# Altium PCB PCB_SystemMove30062018.PcbDoc
Units mm, origin at the board's own origin, x right, y up, seen from the top; angles counter-clockwise.
Board outline 50 x 25 mm, 4 copper layers (Top Layer, L1(GND), VCC, Bottom Layer), stack 0.95 mm thick; 46 components, 32 nets, 228 pads, 40 vias.
Unrouted connection lines stored in the file: 32.
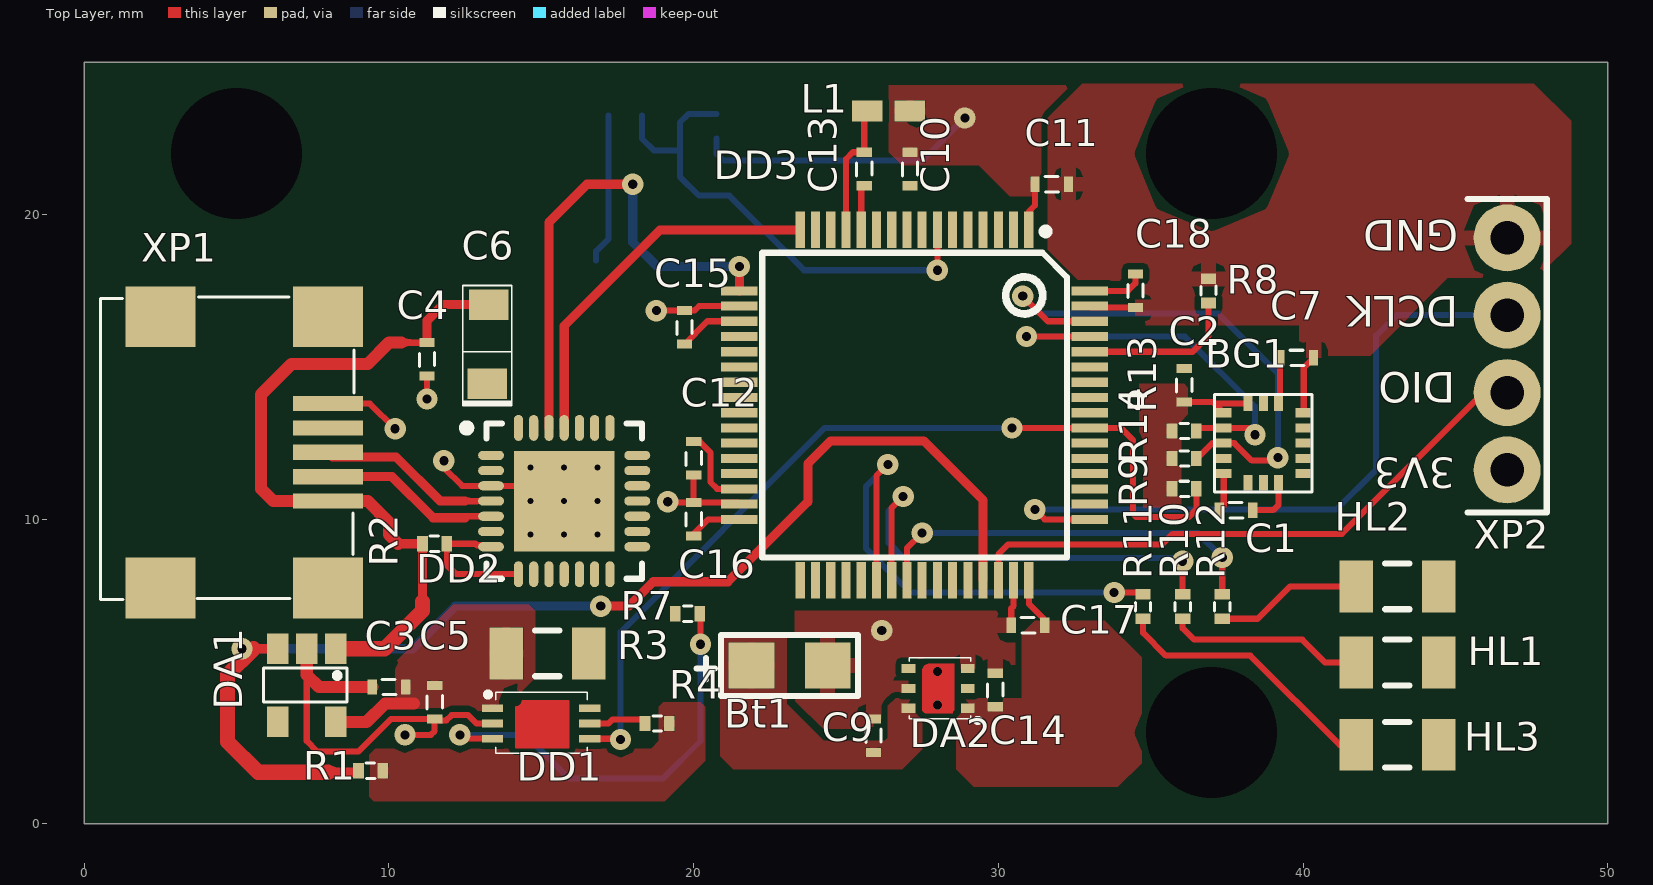
[diagram p0: Top Layer view]
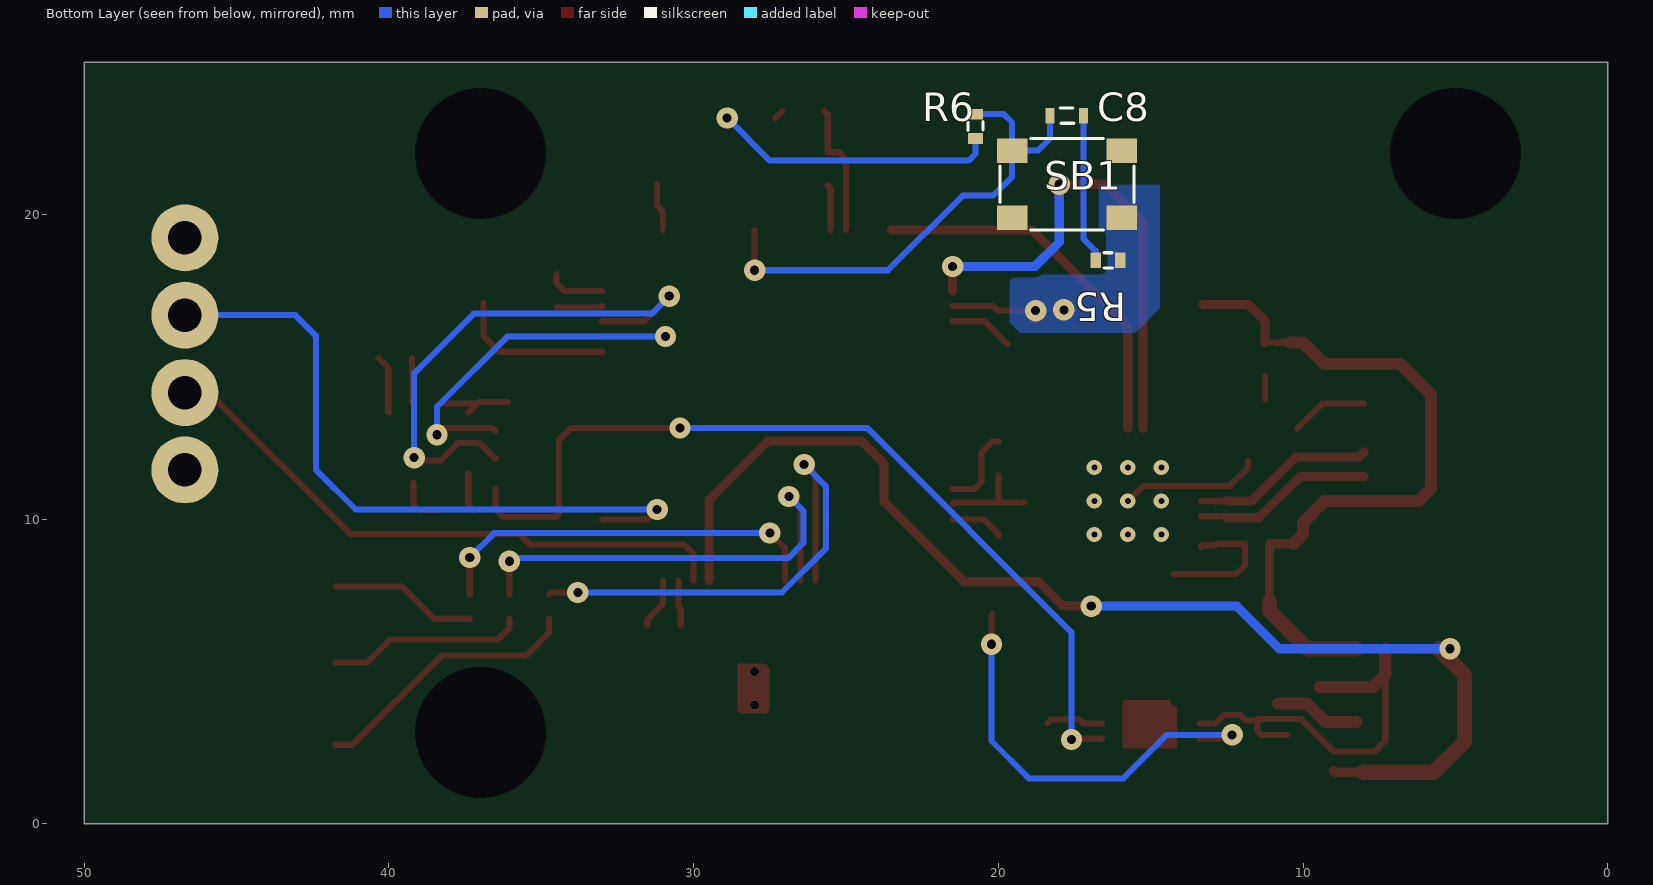
[diagram p1: Bottom Layer view, seen from below]
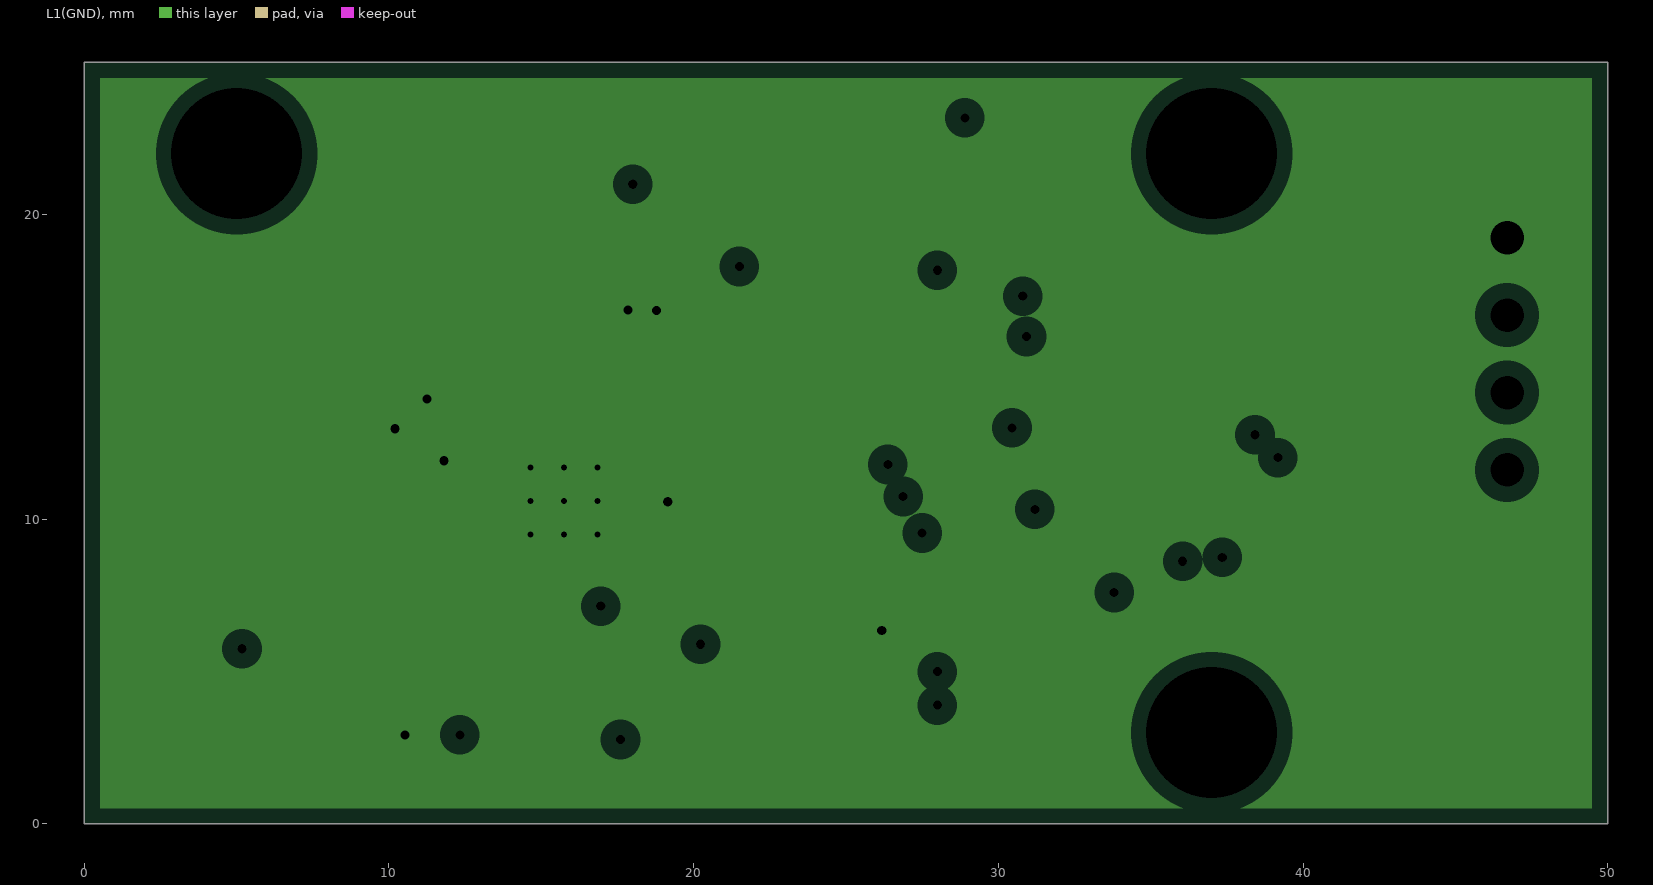
[diagram p2: L1(GND), clearances drawn from the general rule]

## Layer stack, top to bottom
Top Solder: solder mask 0.0102, Solder Resist, Dk 3.5
Top Layer: signal copper 0.035
Dielectric 1: prepreg 0.15, Dk 4.2
L1(GND): plane copper 0.035, net GND
Dielectric 3: core 0.51, FR-4, Dk 4.2
VCC: signal copper 0.035
Dielectric 2: prepreg 0.15, Dk 4.2
Bottom Layer: signal copper 0.035
Bottom Solder: solder mask 0.0102, Solder Resist, Dk 3.5

## Board outline
0,0 0,25 50,25 50,0

## Design rules (kind name [scope] priority, off if disabled: settings)
Clearance [All] p1: gap=0.2 ignorepadtopadclearanceinfootprint=FALSE
Clearance Clearance_Multilayer [OnLayer('Multi-Layer') AND IsPad] p2: gap=0.25 ignorepadtopadclearanceinfootprint=FALSE
DiffPairsRouting [InDifferentialPair('NewDifferentialPairUSB')] p1: maxlimit=0.25 minlimit=0.25 mostfreqgap=0.25 toplayer_minwidth=0.2 toplayer_maxwidth=0.5 toplayer_prefwidth=0.5 midlayer1_minwidth=0.2 midlayer1_maxwidth=0.5 midlayer1_prefwidth=0.5 bottomlayer_minwidth=0.2 bottomlayer_maxwidth=0.5 bottomlayer_prefwidth=0.5 maxuncoupledlength=12.7
PlaneClearance [All] p1: clearance=0.5
PlaneConnect PlaneConnect_Power [InPadClass('Power')] p1: planeconnectstyle=Direct reliefexpansion=0.508 reliefentries=4 reliefconductorwidth=0.254 reliefairgap=0.254
PolygonConnect [InNetClass('Digit')] p1: connectstyle=Relief reliefconductorwidth=0.3 reliefentries=4 polygonreliefangle="90 Angle" airgapwidth=0.2
PolygonConnect PolygonConnect_Via [IsVia] p2: connectstyle=Direct reliefconductorwidth=0.254 reliefentries=4 polygonreliefangle="90 Angle" airgapwidth=0.254
PolygonConnect PolygonConnect_GND [(InNet('AGND') OR InNet('GND')) AND IsPad] p3: connectstyle=Direct reliefconductorwidth=0.5 reliefentries=4 polygonreliefangle="90 Angle" airgapwidth=0.3
RoutingVias [All] p1: holewidth=0.3 width=0.7 viastyle="Through Hole" minholewidth=0.3 minwidth=0.7 maxholewidth=0.3 maxwidth=0.7
SolderMaskExpansion [All] p1: expansion=0.102
Width [All] p1: maxlimit=5 minlimit=0.15 preferedwidth=0.5
27 further rules are at their usual default settings.

## Classes and differential pairs
pad class Power: Bt1-1 Bt1-2 C3-1 C3-2 C5-1 C5-2 C8-1 C8-2 C9-1 C9-2 C14-1 C14-2 DA1-1 DA1-2 DA1-3 DA1-4 DA1-5 DA2-1 DA2-2 DA2-3 DA2-4 DA2-5 DA2-6 DD1-1 DD1-2 DD1-3 DD1-4 DD1-5 DD1-6 R1-1 R1-2 R3-1 R3-2 R4-1 R4-2 R10-1 R10-2 R11-1 R11-2 R12-1 R12-2 R13-1 R13-2 R14-1 R14-2 SB1-1 SB1-2 SB1-3 SB1-4 XP1-3
net class Power_NetClass: +3.3V +3.7V +5VUsb AGND AVDD GND NetC3_1 NetC8_2 NetC12_1 NetDD1_5
net class Digit: Battery_Resourse CHgn INT_LSM6 LED_Power_ON NetBG1_14 NetHL1_1 NetHL2_1 NetHL3_1 RESET SCL_Bat SCL_Sensor SDA_Bat SDA_Sensor SWCLK SWDIO Transmit_Data USART1_RxD USART1_TxD
differential pair NewDifferentialPairUSB: +D_P -D_M

## Components (designator, comment, footprint, x,y, rotation, side; value= is the part's Value field where it differs from the comment)
BG1 "LSM6DS0" LGA-16 37.4,12.5 r90 top
Bt1 "X5HW" X5HW 21.9,5.2 r0 top value="3,7 В 1200 мАч"
C1 "0.1 uF" CAP0402_min 37.8,10.3 r0 top
C2 "10uF" CAP0402_min 36.1,14.4 r90 top
C3 "1 uF" CAP0402_min 10,4.5 r180 top
C4 "0.1 uF" CAP0402_min 11.25,15.25 r270 top
C5 "0.1 uF" CAP0402_min 11.5,4 r270 top
C6 "4.7u" "Capasitor Tantal TypeA MIN" 13.25,15.75 r270 top
C7 "0,012uF" CAP0402_min 39.8,15.3 r0 top
C8 "0.1 uF" CAP0402_min 17.75,23.25 r180 bottom
C9 "4.7u" CAP0402_min 25.9,2.9 r90 top
C10 "0.1 uF" CAP0402_min 27.1,21.5 r270 top
C11 "0.1 uF" CAP0402_min 31.75,21 r0 top
C12 "0.1 uF" CAP0402_min 20,12 r270 top
C13 "0.1 uF" CAP0402_min 25.6,21.5 r270 top
C14 "4.7u" CAP0402_min 29.9,4.4 r90 top
C15 "0.1 uF" CAP0402_min 19.7,16.3 r270 top
C16 "0.1 uF" CAP0402_min 20,10 r270 top
C17 "0.1 uF" CAP0402_min 30.975,6.525 r180 top
C18 "0.1 uF" CAP0402_min 34.5,17.5 r270 top
DA1 "MA1555" SOT23-5 8.25,5.75 r180 top
DA2 "TPS78230" WSON-6 29,3.8 r90 top value=3V
DD1 "LTC2941IDC" DFN-6 13.4,3.8 r270 top value=5V
DD2 "CP2102" QFN28 15.75,10.6 r0 top
DD3 "STM32F401RE" LQFP-64 27.25,13.75 r270 top
HL1 "TO-1608BC-MRE" LED1206 43.1,5.3 r0 top value=RED
HL2 "TO-1608BC-PG" LED1206 43.1,7.8 r0 top value=GREEN
HL3 "TO-1608BC-MRE" LED1206 43.1,2.6 r0 top value=RED
L1 "220u" LQG15HN15NJ 26.4,23.4 r180 top
R1 "10k" 0402 9,1.75 r0 top
R2 "0" 0402 11.1,9.2 r0 top
R3 "0.01" 1206 15.2,5.6 r0 top
R4 "10k" 0402 19.2,3.3 r180 top
R5 "100" 0402 16,18.5 r0 bottom
R6 "4.7k" 0402 20.75,23.3 r270 bottom
R7 "4.7k" 0402 20.2,6.9 r180 top
R8 "10k" 0402 36.9,17.9 r270 top
R9 "4.7k" 0402 36.5,11 r180 top
R10 "470" 0402 36.05,6.738 r90 top
R11 "470" 0402 34.75,6.738 r90 top
R12 "470" 0402 37.35,6.738 r90 top
R13 "4.7k" 0402 36.5,12.9 r180 top
R14 "4.7k" 0402 36.5,12 r180 top
SB1 "*" IT-1184 17.75,21 r0 bottom
XP1 "USB/M-1J" USB/M-1J 8,12.2 r90 top
XP2 "DS-1021-1x4" Connector_STKLink 46.7,11.62 r90 top value=100V

## Footprints (in the part's own frame and the unit in brackets; to place one, negate y for a bottom-side part, rotate by r counter-clockwise, add the part's x,y. Pads: shape width x height; smd on the part's side, far side on the other; paste and mask are expansions set on the pad)
0402 [mm]
  rect 0.35x0.5 smd mask+0.07: 1(0,0) 2(0.8,0)
  silkscreen extent 0.25,-0.25 0.54,0.25, body extent -0.1,-0.25 0.9,0.25, height 0.25
1206 [mm]
  rect 1.1x1.7 smd: 1(-1.35,0) 2(1.35,0)
  silkscreen extent -0.4,-0.75 0.4,0.75, body extent -1.55,-0.83 1.55,0.83, height 0.67
CAP0402_min [mm]
  rect 0.3x0.5 smd mask+0.07: 1(-0.55,0) 2(0.55,0)
  silkscreen extent -0.23,-0.25 0.23,0.25, body extent -0.73,-0.25 0.73,0.25, height 0.51
"Capasitor Tantal TypeA MIN" [mm]
  rect 1x1.3 smd: 1(-1.3,0.025) 2(1.3,-0.025)
  silkscreen extent -1.92,-0.82 2.03,0.77, body extent -1.6,-0.83 1.6,0.78, height 1.61
Connector_STKLink [mm]
  round 2.2 hole 1.1: 1(0,0) 2(2.54,0) 3(5.08,0) 4(7.62,0)
  silkscreen extent -1.4,-1.3 8.9,1.3, body extent -1.24,-1.3 8.92,1.24, height 8.54
DFN-6 [mm] "2mmx3mm"
  rect 0.25x0.7 smd: 1(0,0) 2(0.5,0) 3(1,0) 4(1.002,3.194) 5(0.502,3.194) 6(0.002,3.194)
  Top Layer region: -0.25,1.004 1.299,1.004 1.299,2.504 -0.25,2.504
  Top Layer region: -0.25,1.004 1.299,1.004 1.299,0.754 1.299,0.754 -0.051,0.754 -0.051,0.844 -0.058,0.877 -0.076,0.904 -0.076,0.904
  Top Layer lines w0.05: 1.299,0.754 1.299,2.504 -0.25,2.504 -0.25,1.35 -0.25,0.975 cw(c-0.25,0.775) -0.051,0.754 1.249,0.754 1.299,0.754
  silkscreen extent -0.53,-0.19 1.48,3.1, body extent -0.52,0.1 1.48,3.1, height 0.8
IT-1184 [mm] "3x3x1.5"
  rect 1x0.8 smd: 1(-1.8,1.1) 2(1.8,1.1) 3(-1.8,-1.1) 4(1.8,-1.1)
  silkscreen extent -2.2,-1.5 2.2,1.5, body extent -2,-1.25 2,1.25, height 1.4
LED1206 [mm]
  rect 1.1x1.7 smd: 1(-1.35,0) 2(1.35,0)
  silkscreen extent -0.4,-0.75 0.4,0.75, body extent -1.6,-0.8 1.6,0.8, height 1.1
LGA-16 [mm]
  rect 0.3x0.5 smd mask+0.075: 1(1,0) 2(0.5,0) 3(0,0) 4(-0.5,0) 5(-1,0) 9(-1,-2.6) 10(-0.5,-2.6) 11(0,-2.6) 12(0.5,-2.6) 13(1,-2.6)
  rect 0.5x0.3 smd mask+0.075: 6(-1.3,-0.8) 7(-1.3,-1.3) 8(-1.3,-1.8) 14(1.3,-1.8) 15(1.3,-1.3) 16(1.3,-0.8)
  silkscreen extent -1.6,-2.9 1.6,0.3, body extent -1.5,-2.8 1.5,0.2, height 1.01
LQFP-64 [mm] "LQFP, 64-Leads, Body 10,30x10,30mm, Pitch 0,50mm, IPC Medium Density"
  rect 1.2x0.3 smd mask+0.075: 1(-5.75,3.75) 2(-5.75,3.25) 3(-5.75,2.75) 4(-5.75,2.25) 5(-5.75,1.75) 6(-5.75,1.25) 7(-5.75,0.75) 8(-5.75,0.25) 9(-5.75,-0.25) 10(-5.75,-0.75) 11(-5.75,-1.25) 12(-5.75,-1.75) 13(-5.75,-2.25) 14(-5.75,-2.75) 15(-5.75,-3.25) 16(-5.75,-3.75) 33(5.75,-3.75) 34(5.75,-3.25) 35(5.75,-2.75) 36(5.75,-2.25) 37(5.75,-1.75) 38(5.75,-1.25) 39(5.75,-0.75) 40(5.75,-0.25) 41(5.75,0.25) 42(5.75,0.75) 43(5.75,1.25) 44(5.75,1.75) 45(5.75,2.25) 46(5.75,2.75) 47(5.75,3.25) 48(5.75,3.75)
  rect 0.3x1.2 smd mask+0.075: 17(-3.75,-5.75) 18(-3.25,-5.75) 19(-2.75,-5.75) 20(-2.25,-5.75) 21(-1.75,-5.75) 22(-1.25,-5.75) 23(-0.75,-5.75) 24(-0.25,-5.75) 25(0.25,-5.75) 26(0.75,-5.75) 27(1.25,-5.75) 28(1.75,-5.75) 29(2.25,-5.75) 30(2.75,-5.75) 31(3.25,-5.75) 32(3.75,-5.75) 49(3.75,5.75) 50(3.25,5.75) 51(2.75,5.75) 52(2.25,5.75) 53(1.75,5.75) 54(1.25,5.75) 55(0.75,5.75) 56(0.25,5.75) 57(-0.25,5.75) 58(-0.75,5.75) 59(-1.25,5.75) 60(-1.75,5.75) 61(-2.25,5.75) 62(-2.75,5.75) 63(-3.25,5.75) 64(-3.75,5.75)
  silkscreen extent -5.8,-5 5,5, body extent -5.89,-5.89 5.89,5.89, height 1.55
LQG15HN15NJ [mm]
  rect 1x0.7 smd: 1(-0.7,0) 2(0.7,0)
  body extent -0.73,-0.25 0.73,0.25, height 0.51
QFN28 [mm] "5x5x0.5mm"
  oval 0.85x0.3 smd: 1(-2.4,1.5) 2(-2.4,1) 3(-2.4,0.5) 4(-2.4,0) 5(-2.4,-0.5) 6(-2.4,-1) 7(-2.4,-1.5) 15(2.4,-1.5) 16(2.4,-1) 17(2.4,-0.5) 18(2.4,0) 19(2.4,0.5) 20(2.4,1) 21(2.4,1.5)
  rect 3.3x3.3 smd: 3(0,0)
  oval 0.3x0.85 smd: 8(-1.5,-2.4) 9(-1,-2.4) 10(-0.5,-2.4) 11(0,-2.4) 12(0.5,-2.4) 13(1,-2.4) 14(1.5,-2.4) 22(1.5,2.4) 23(1,2.4) 24(0.5,2.4) 25(0,2.4) 26(-0.5,2.4) 27(-1,2.4) 28(-1.5,2.4)
  rect 0x0 smd: 29(-0.85,0) 30(-0.35,0) 31(0,0.85) 32(0,0.35) 33(0.85,0) 34(0.35,0) 35(0,-0.85) 36(0,-0.35)
  silkscreen extent -3.32,-2.55 2.55,2.55, body extent -2.5,-2.5 2.5,2.5, height 1
SOT23-5 [mm]
  rect 0.7x1 smd mask+0.05: 1(0,0) 2(0.95,0) 3(1.9,0) 4(1.9,2.4) 5(0,2.4)
  silkscreen extent -0.38,0.63 2.37,1.75, body extent -0.5,-0.05 2.5,2.45, height 1.05
USB/M-1J [mm]
  rect 0.5x2.3 smd mask+0.05: 1(-1.6,0) 2(-0.8,0) 3(0,0) 4(0.8,0) 5(1.6,0)
  rect 2x2.3 smd mask+0.05: -(-4.45,0) -(-4.45,5.5) -(4.45,0) -(4.45,5.5)
  silkscreen extent -4.82,-0.85 5.1,7.47, body extent -4.8,-0.82 5.1,8.42, height 3.93
WSON-6 [mm]
  rect 0.3x0.45 smd mask+0.07: 1(0,0) 2(0.65,0) 3(1.3,0) 4(1.3,1.95) 5(0.65,1.95) 6(0,1.95)
  Top Layer region: -0.062,0.45 -0.107,0.487 -0.162,0.5 -0.162,0.5 -0.162,1.375 -0.146,1.438 -0.1,1.483 -0.037,1.5 -0.037,1.5 1.227,1.5 1.345,1.468 1.431,1.381 1.463,1.262 1.463,1.262 1.462,0.45
  silkscreen extent -0.42,-0.35 1.65,1.92, body extent -0.35,-0.1 1.65,1.92, height 0.8
X5HW [mm]
  rect 1.5x1.5 smd: 1(0,0) 2(2.5,0)
  silkscreen extent -1.8,-1 3.5,1

## Part data
BG1: "IMEMO", Documentation=https://www.st.com/resource/en/datasheet/lsm6ds0.pdf, Part Number=LSM6DS0
C1 C4 C5 C8 C10 C11 C12 C13 C15 C16 C17 C18: library part Capasitor, Manufacturer=TDK, Package=0402, Part Number=C1005X7R1H104KT000F, Voltage=50V, Price=0,15, Quantity=50, ShoppingPlace=http://belchip.by/product/?selected_product=33981
C2: library part Capasitor, Manufacturer="Murata Manufacturing", Package=0402, Part Number=GRM1535C1H100J, Voltage=50V, Price=0,02, Quantity=50, ShoppingPlace=https://www.ru-chipdip.by/product/grm1535c1h100j
C3: library part Capasitor, Manufacturer="Murata Manufacturing", Package=0402, Part Number=GRM155R61A105KE15B, Voltage=10V, Price=0,035, Quantity=50, ShoppingPlace=https://www.ru-chipdip.by/product/grm155r61a105k
C6: library part "Capasitor Electrolit", Manufacturer=China, Package="Type A", Part Namber=TECAP4.7/16VA10, Power=16V, Price=0.16, ShoppingPlace=https://www.ru-chipdip.by/product0/850917081
C7: library part Capasitor, Manufacturer="Murata Manufacturing", Package=0402, Part Number=GRM155R71H123K, Voltage=50V, Price=0,02, Quantity=50, ShoppingPlace=https://www.ru-chipdip.by/product/grm155r71h123k
C9 C14: library part Capasitor, Manufacturer="Murata Manufacturing", Package=0402, Part Number=GRM2165C1H4R7CD01D, Voltage=50V, Price=0,035, Quantity=50, ShoppingPlace=https://www.ru-chipdip.by/product/grm2165c1h4r7c
DA1: library part MAX1555, Manufacturer="Maxim Integrated Products", Package=SOT-23-5, Part Number=MAX1555EZK+T, Price=1, Quantity=1, ShoppingPlace=http://belchip.by/product/?selected_product=06393
DA2: Manufacturer="Texas Instruments", Package=SOT-23-6, Part Number=TSOT23-5, Price=1.58, Quantity=1, ShoppingPlace=https://www.digikey.com/product-detail/en/texas-instruments/TPS78230DDCR/296-24372-2-ND/2051745
DD1: Manufacturer="RoHS Compliant", Package=6-DFN, Part Number=LTC2941IDC, Price=1.58, Quantity=1, ShoppingPlace=https://www.digikey.com/product-detail/en/linear-technology-analog-devices/LTC1754ES6-5-TRMPBF/LTC1754ES6-5-TRMPBFTR-ND/962607
DD2: "USB/USART Converter", Manufacture="Silicon Labs", Documentation=https://www.silabs.com/documents/public/data-sheets/CP2102-9.pdf, Packge=QFN-28, Part Number=CP2102
DD3: Manufacturer="STM MicroElectronics", Documentation=http://www.keil.com/dd/docs/datashts/st/stm32f4xx/dm00102166.pdf, Part Number=STM32F401RE, Price=12, Quantity=1
HL1 HL3: library part LED, Manufacturer="Taiwan Oasis Technology Co", Package=1608, Part Number=TO-1608BC-MRE, Price=0.03, Quantity=10, Shopping Place=https://www.ru-chipdip.by/product/to-1608bc-mre
HL2: library part LED, Manufacturer="Taiwan Oasis Technology", Package=1608, Part Number=TO-1608BC-PG, Price=0.03, Quantity=10, Shopping Place=https://www.ru-chipdip.by/product/to-1608bc-pg
L1: library part Inductor, Manufacturer=Bourns, Package=1812, Part Number=CM453232-221KL, Price=0.225, Quantity=2, ShoppingPlace=https://www.ru-chipdip.by/product/cm453232-221kl
R1 R4 R8: library part Resistor, Manufacturer=Тайвань, Package=0402, Part Number=RC0402FR-0710KL, Power=0.062W, Price=0,015, Quntity=50
R2: library part Resistor, Manufacturer=Тайвань, Package=0402, Part Number=RC0402JR-070RL, Power=0.062W, Price=0.015, Quntity=50, ShoppingPlace=https://www.ru-chipdip.by/product0/9000189662
R3: library part Resistor, Manufacturer=China, Package=1206, Part Number=120600R1, Power=0.75W, Price=4, Quntity=50, ShoppingPlace=https://ru.aliexpress.com/item/Power-Adapter-Chip-Resistors-1206-0-01R-0-01-ohms-R010-100pcs/32834259073.html?spm=a2g0v.search0604.3.249.2a2b60c7NBGyXV&ws_ab_test=searchweb0_0,searchweb201602_3_10152_10151_10065_10344_10068_10342_10343_10340_10341_10696_10084_5722520_10083_5711520_10618_10307_10059_5722620_5722920_5722720_5722820_100031_5711420_10103_524_10624_10623_10622_10621_10620_10125,searchweb201603_6,ppcSwitch_5&algo_expid=fa6d5ed5-cdca-4e44-a6e1-815c4b4f7787-37&algo_pvid=fa6d5ed5-cdca-4e44-a6e1-815c4b4f7787&transAbTest=ae803_2&priceBeautifyAB=0
R5: library part Resistor, Manufacturer=Тайвань, Package=0402, Part Number=RC0603FR-07100RL, Power=0.062W, Price=0.03, Quntity=50, ShoppingPlace=https://www.ru-chipdip.by/product0/9000079616
R6 R7 R9 R13 R14: library part Resistor, Manufacturer=Тайвань, Package=0402, Part Number=RC0402JR-074K7L, Power=0.062W, Price=0.03, Quntity=50, ShoppingPlace=https://www.ru-chipdip.by/product0/9000189640
R10 R11 R12: library part Resistor, Manufacturer=Тайвань, Package=0402, Part Number=RC0805FR-07470RL, Power=0,062W, Price=0,015, Quntity=50, ShoppingPlace=https://www.ru-chipdip.by/product0/9000079478
SB1: library part Button
XP1: library part USB-M-1J, Manufacturer=ESB, Package="ESB 22 SERIES", Part Number=USB/M-1J, Price=2, Quantity=1, ShoppingPlace=http://belchip.by/product/?selected_product=07369
XP2: library part Connector_STKLink, Manufacturer="Ningbo connfly electronic", Package=DS-1021, Part Number=DS-1021-1x4, Price=0,09, Quantity=10, ShoppingPlace=https://www.ru-chipdip.by/product/pls-4
Bt1: Quantity=https://ru.aliexpress.com/item/3-7-1200-Lipo/32852574199.html?spm=a2g0v.search0604.3.181.2111fc08nULavV&ws_ab_test=searchweb0_0%2Csearchweb201602_3_10152_10151_10065_10344_10068_10342_10343_10340_10341_10696_10084_5722520_10083_5711520_10618_10307_10059_5722620_5722920_306_5722720_5722820_100031_5711420_10103_10624_10623_10622_10621_10620_10125%2Csearchweb201603_31%2CppcSwitch_5&algo_expid=a7204690-5c98-48fe-b8bb-b8922ec76835-26&algo_pvid=a7204690-5c98-48fe-b8bb-b8922ec76835&transAbTest=ae803_2&priceBeautifyAB=0

## Free pads (board coordinates)
  round 3 hole 4.3: -(5,22) -(37,3) -(37,22)

## Via types
v1: diameter 0.7, hole 0.3, Top Layer to Bottom Layer, 22 vias
v2: diameter 0.5, hole 0.2, Top Layer to Bottom Layer, 9 vias
v3: diameter 0.7, hole 0.3, Top Layer to L1(GND), tented top, 6 vias
v4: diameter 0.3, hole 0.3, Top Layer to Bottom Layer, 2 vias
v5: diameter 0.7, hole 0.3, L1(GND) to Bottom Layer, tented bottom, 1 vias

## Nets (pads, with @x,y where several pads share a name; then routed paths per layer and width w, separated by ;. In a path a pad name is that pad's centre, name@x,y a point inside that pad or via, vN(x,y) a via of type N, cw(c..) or ccw(c..) an arc to the next point about the centre after c; other vN are vias at no path point)
+3.3V: BG1.1 BG1.4 BG1.5 BG1.16 C1.1 C2.1 C10.1 C11.1 C14.1 C15.2 C16.2 C17.1 C18.1 DA2.1 DD3.1 DD3.19 DD3.32 DD3.48 DD3.64 L1.1 R1.2 R4.1 R6.2 R7.2 R9.2 R13.2 R14.2 XP2.1 | length 22.5
  Top Layer w0.2: C15.2 20.45,16.5 DD3.19 ; C16.2 20,9.525 20.475,10 DD3.32 ; L1.1 L1.1@27.325,23.175 ; DD3.48 31,7.225 31.525,6.7 C17.1 ; DD3.1 31,20.1 31.2,20.3 C11.1 ; DD3.64 34.25,17.5 34.5,17.75 C18.1 ; C2.1 37.05,13.85 37.1,13.8 ; C1.1 37.4,10.45 BG1.5 ; BG1.1 37.1,13.8 ; BG1.16 37.1,13.8
  Bottom Layer w0.2: R6.2 20.75,22 20.975,21.775 27.5,21.775 v1(28.9,23.175)
+3.7V: Bt1.1 C9.1 DA2.6 DD1.6 R3.2
+5VUsb: C4.1 C6.1 DA1.1 R2.1 XP1.1 | length 24.1
  Top Layer w0.2: 10.4,15.8 C4.1
  Top Layer w0.3: 10.3,9.2 R2.1 11.1,7.3 ; C4.1 11.25,16.525 11.775,17.05 C6.1
  Top Layer w0.4: 10.3,9.2 10,9.5 10,9.9 9.3,10.6 XP1.1 6.2,10.6 5.8,11 5.8,14.1 6.8,15.1 9.3,15.1 10,15.8 10.4,15.8
  Top Layer w0.5: DA1.1 9.85,5.75 11.1,7 11.1,7.3
AGND: C13.2 DD3.12 | length 1.5
  Top Layer w0.2: DD3.12 25.5,20.85 C13.2
AVDD: C13.1 DD3.13 L1.2 | length 4.4
  Top Layer w0.2: DD3.13 25,21.825 25.225,22.05 C13.1 25.6,23.3 L1.2
Battery_Resourse: DD3.39 R10.2 | length 15.6
  Top Layer w0.2: DD3.39 26.5,10.375 v1(26.875,10.75) ; R10.2 v1(36.05,8.625)
  Bottom Layer w0.2: v1(26.875,10.75) 26.4,10.275 26.4,9.225 26.9,8.725 35.95,8.725 v1(36.05,8.625)
CHgn: DA1.3 DD3.45 R1.1 | length 40.6
  Top Layer w0.3: v1(5.175,5.75) 5.55,5.75 DA1.3 ; 8,1.7 8.95,1.7 R1.1 ; v1(16.95,7.15) 17.875,7.15 18.675,7.95 21.125,7.95 23.75,10.575 23.75,11.825 24.5,12.575 27.55,12.575 29.5,10.625 DD3.45
  Top Layer w0.5: 5.55,5.75 4.7,4.9 4.7,2.7 5.7,1.7 8,1.7
  Bottom Layer w0.3: v1(5.175,5.75) 10.775,5.75 12.175,7.15 v1(16.95,7.15)
D_M: DD2.5 XP1.2 | length 5.9
  Top Layer w0.2: 12.5,10.05 12.55,10.1 DD2.5
  Top Layer w0.3: XP1.2 10.1,11.4 11.45,10.05 12.5,10.05
D_P: DD2.4 XP1.3 | length 6
  Top Layer w0.2: 12.5,10.6 DD2.4
  Top Layer w0.3: XP1.3 8.15,12.05 10.228,12.05 11.678,10.6 12.5,10.6
GND: BG1.8 BG1.9 BG1.10 BG1.11 BG1.12 BG1.13 BG1.15 Bt1.2 C1.2 C2.2 C3.2 C4.2 C5.2 C6.2 C7.2 C9.2 C10.2 C11.2 C12.2 C14.2 C15.1 C16.1 C17.2 C18.2 DA1.2 DA2.3 DA2.5 DD1.2 DD2.3 DD3.18 DD3.31 DD3.47 DD3.63 HL1.2 HL2.2 HL3.2 R5.1 R8.1 SB1.1 XP1.5 XP2.4 | length 34.3
  Top Layer w0.2: 7.3,4.9 7.3,2.725 7.65,2.375 8.998,2.375 10.073,3.45 C5.2 ; XP1.5 9.375,13.8 v3(10.2,12.975) ; v3(10.525,2.925) 11.375,2.925 11.5,3.05 C5.2 ; v3(11.25,13.95) C4.2 ; v3(11.8,11.925) 11.8,11.7 12.4,11.1 13.35,11.1 15.25,11.1 v2(15.75,10.6) ; DD1.2 12.869,3.3 12.594,3.575 12.056,3.575 11.881,3.4 11.55,3.4 C5.2 ; v1(18.775,16.85) C15.1 20.025,16.85 20.175,17 DD3.18 ; v3(19.15,10.575) 19.175,10.55 C16.1 ; C12.2 C16.1 ; DD3.31 21.45,10.55 C16.1 ; C17.2 30.425,7.075 30.5,7.15 DD3.47 ; DD3.63 33.05,16.95 C18.2 ; C1.2 39.025,10.3 39.2,10.475 BG1.8 ; BG1.13 40.025,13.525 40.025,14.975 C7.2
  Top Layer w0.4: DA1.2 7.3,4.9 7.7,4.5 C3.2
  other v2: 14.65,9.5 15.75,9.5 16.85,9.5 14.65,10.6 16.85,10.6 14.65,11.7 15.75,11.7 16.85,11.7
  other v3: 26.175,6.35
  other v5: 17.85,16.875
INT_LSM6: BG1.7
LED_Power_ON: DD3.40 R12.2 | length 13.2
  Top Layer w0.2: DD3.40 27,9.05 v1(27.5,9.55) ; R12.2 v1(37.35,8.75)
  Bottom Layer w0.2: v1(27.5,9.55) 36.55,9.55 v1(37.35,8.75)
NetBG1_14: BG1.14 C7.1 | length 1.5
  Top Layer w0.2: BG1.14 39.25,13.85 C7.1
NetC3_1: C3.1 C5.1 DA1.5 DD1.1 R3.1 | length 2.8
  Top Layer w0.4: DA1.5 9.266,3.35 9.866,3.95 10.825,3.95
NetC8_2: C8.2 R5.2 | length 4.9
  Bottom Layer w0.2: R5.2 16.8,18.8 17.2,19.2 C8.2
NetC12_1: C12.1 DD3.30 | length 2.7
  Top Layer w0.2: C12.1 20.2,12.55 20.55,12.2 20.55,11.225 20.775,11 DD3.30
NetDD1_5: DD1.5 R4.2 | length 1.9
  Top Layer w0.2: DD1.5 16.596,3.3 17.206,3.3 17.331,3.425 18.275,3.425 R4.2
NetDD2_7: DD2.7 DD2.8 R2.2 | length 4.7
  Top Layer w0.2: DD2.7 13.3,9.15 12.889,9.15 12.839,9.2 R2.2 11.9,8.5 12.2,8.2 DD2.8
NetDD3_60: DD3.60 R8.2 | length 5.2
  Top Layer w0.2: DD3.60 36.375,15.5 36.9,16.025 R8.2
NetHL1_1: HL1.1 R10.1 | length 6.5
  Top Layer w0.2: R10.1 36.05,6.425 36.425,6.05 39.975,6.05 40.725,5.3 HL1.1
NetHL2_1: HL2.1 R12.1 | length 4.8
  Top Layer w0.2: R12.1 38.513,6.738 39.575,7.8 HL2.1
NetHL3_1: HL3.1 R11.1 | length 9
  Top Layer w0.2: R11.1 34.75,6.275 35.5,5.525 38.275,5.525 41.2,2.6 HL3.1
RESET: C8.1 DD3.7 R6.1 SB1.4 | length 16.3
  Top Layer w0.2: v1(28,18.175) DD3.7
  Bottom Layer w0.2: C8.1 18.3,22.5 18.7,22.1 SB1.4 ; R6.1 19.825,23.3 19.55,23.025 SB1.4 ; v1(28,18.175) 23.625,18.175 21.175,20.625 20.175,20.625 19.55,21.25 SB1.4
SCL_Bat: DD1.3 DD3.29 R7.1 | length 14.3
  Top Layer w0.2: v1(12.325,2.925) 12.45,2.8 DD1.3 ; R7.1 20.225,6.875 v1(20.225,5.9)
  Bottom Layer w0.2: v1(12.325,2.925) 14.475,2.925 15.9,1.5 19,1.5 20.225,2.725 v1(20.225,5.9)
SCL_Sensor: BG1.2 DD3.61 R13.1 | length 13.5
  Top Layer w0.2: v1(30.925,16) DD3.61 ; R13.1 36.6,13 BG1.2 38.2,13 v1(38.425,12.775)
  Bottom Layer w0.2: v1(30.925,16) 36.125,16 38.425,13.7 v1(38.425,12.775)
SDA_Bat: DD1.4 DD3.55 R9.1 | length 29.6
  Top Layer w0.2: DD1.4 17.577,2.798 v1(17.6,2.775) ; v1(30.45,13) DD3.55 34.025,13 34.425,12.6 34.425,10.175 34.525,10.075 36.25,10.075 36.5,10.325 R9.1
  Bottom Layer w0.2: v1(17.6,2.775) 17.6,6.3 24.3,13 v1(30.45,13)
SDA_Sensor: BG1.3 DD3.62 R14.1 | length 18
  Top Layer w0.2: v1(30.8,17.325) 31.625,16.5 DD3.62 ; R14.1 36.525,12 37.025,12.5 BG1.3 37.75,12.5 38.325,11.925 39.175,11.925 v1(39.175,12.025)
  Bottom Layer w0.2: v1(30.8,17.325) 31.375,16.75 37.225,16.75 39.175,14.8 v1(39.175,12.025)
SWCLK: DD3.49 XP2.3 | length 22.7
  Top Layer w0.2: v1(31.2,10.325) 31.525,10 DD3.49
  Bottom Layer w0.2: v1(31.2,10.325) 41.1,10.325 42.4,11.625 42.4,16.025 43.075,16.7 XP2.3
SWDIO: DD3.46 XP2.2 | length 19.7
  Top Layer w0.2: DD3.46 30,8.85 30.325,9.175 35.375,9.175 35.725,9.525 41.275,9.525 45.91,14.16 XP2.2
Transmit_Data: DD3.38 R11.2 | length 16.7
  Top Layer w0.2: DD3.38 26,11.425 v1(26.375,11.8) ; v1(33.8,7.6) 34.688,7.6 R11.2
  Bottom Layer w0.2: v1(26.375,11.8) 25.65,11.075 25.65,9.05 27.1,7.6 v1(33.8,7.6)
USART1_RxD: DD2.25 DD3.16 | length 12.4
  Top Layer w0.3: DD2.25 15.75,16.35 18.9,19.5 DD3.16
USART1_TxD: DD2.26 DD3.17 | length 16.5
  Top Layer w0.3: DD2.26 15.25,19.75 16.5,21 v1(18,21) ; DD3.17 v1(21.5,18.3)
  Bottom Layer w0.3: v1(18,21) 18,19.1 18.8,18.3 v1(21.5,18.3)
pads on no net: BG1.6 DA1.4 DA2.2 DA2.4 DD2.1 DD2.2 DD2.6 DD2.9 DD2.10 DD2.11 DD2.12 DD2.13 DD2.14 DD2.15 DD2.16 DD2.17 DD2.18 DD2.19 DD2.20 DD2.21 DD2.22 DD2.23 DD2.24 DD2.27 DD2.28 DD2.29 DD2.30 DD2.31 DD2.32 DD2.33 DD2.34 DD2.35 DD2.36 DD3.2 DD3.3 DD3.4 DD3.5 DD3.6 DD3.8 DD3.9 DD3.10 DD3.11 DD3.14 DD3.15 DD3.20 DD3.21 DD3.22 DD3.23 DD3.24 DD3.25 DD3.26 DD3.27 DD3.28 DD3.33 DD3.34 DD3.35 DD3.36 DD3.37 DD3.41 DD3.42 DD3.43 DD3.44 DD3.50 DD3.51 DD3.52 DD3.53 DD3.54 DD3.56 DD3.57 DD3.58 DD3.59 SB1.2 SB1.3 XP1.4 XP1.-
copper on no net:
  other v4: 28,3.9 28,5

## Polygon pours and split planes (outlines as drawn)
NetC3_1 on Top Layer "Top Overlay-No Net" (solid, remove dead copper, pour order 2): 10.2,5.1 10.2,4 10.5,3.7 13.7,3.7 14.8,4.8 14.8,7 14.6,7.2 12.1,7.2 10.2,5.3 10.3,5.3
+3.7V on Top Layer "Top Overlay-No Net" (solid, remove dead copper, pour order 4): 20.875,6.125 20.875,2.225 21.3,1.8 26.85,1.8 27.5,2.45 27.5,3.975 27.35,4.125 26.625,4.125 26.375,3.875 26.375,2.825 26.275,2.725 24.275,2.725 23.05,3.95 23.05,6.125
+3.3V on Top Layer "Top Overlay-No Net" (solid, remove dead copper, pour order 6): 28.625,4.125 28.625,1.8 29.2,1.225 33.925,1.225 34.7,2 34.7,5.475 33.5,6.675 31.2,6.675 30.775,6.25 30.775,4.125
GND on Top Layer "Top Overlay-No Net" (solid, remove dead copper, pour order 8): 23.325,7 23.325,4.05 24.25,3.125 26.075,3.125 26.275,3.325 26.275,4.1 26.45,4.275 27.38,4.275 27.88,4.775 29.275,4.775 29.725,4.325 30.55,4.325 30.725,4.5 30.725,6.425 30.15,7
GND on Top Layer "Top Overlay-No Net" (solid, remove dead copper, pour order 10): 39.875,15.375 42.2,15.375 44.75,17.925 47.675,17.925 48.8,19.05 48.8,23.075 47.575,24.3 32.75,24.3 31.625,23.175 31.625,18.85 34.1,16.375 39.875,16.375
+3.3V on Top Layer "Top Overlay-No Net" (solid, remove dead copper, pour order 12): 9.35,2.475 9.35,0.9 9.5,0.75 19.05,0.75 20.375,2.075 20.375,3.85 20.225,4 19,4 18.85,3.85 18.85,2.725 18.6,2.475
+3.3V on Top Layer "Top Overlay-No Net" (solid, remove dead copper, pour order 14): 34.625,10.375 34.75,10.25 35.875,10.25 36,10.375 36,13.225 36.225,13.45 36.225,14.325 36.1,14.45 34.625,14.45
+3.3V on Top Layer "Top Overlay-No Net" (solid, remove dead copper, pour order 16): 26.4,24.25 26.4,22.05 26.825,21.625 29.35,21.625 30.375,20.6 31.4,20.6 31.5,20.7 31.5,23.375 32.375,24.25
GND on Bottom Layer "Top Overlay-No Net" (solid, remove dead copper, pour order 18): 14.7,20.975 14.7,16.925 15.5,16.125 19.275,16.125 19.625,16.475 19.625,17.825 19.425,18.025 16.625,18.025 16.45,18.2 16.45,19.375 16.7,19.625 16.7,20.975
GND on L1(GND) (split plane): 49.49,0.51 0.51,0.51 0.51,24.49 49.49,24.49

## Silkscreen, mask and mechanical layers (free items; w line width, h text height)
Board:
  the board outline again, w0.254

## Text inside footprints (layer, text, board x,y; h text height)
XP2: Top Overlay "3V3" at 45,12.02 h1 r180; Top Overlay "DIO" at 45,14.82 h1 r180; Top Overlay "DCLK" at 45.1,17.32 h1 r180; Top Overlay "GND" at 45.1,19.82 h1 r180